# Altium PCB Pcb.PcbDoc
Units mil, origin at the board's own origin, x right, y up, seen from the top; angles counter-clockwise.
Board outline 3543.32 x 3543.32 mil, 2 copper layers (Top Layer, Bottom Layer); 60 components, 123 nets, 337 pads, 105 vias.
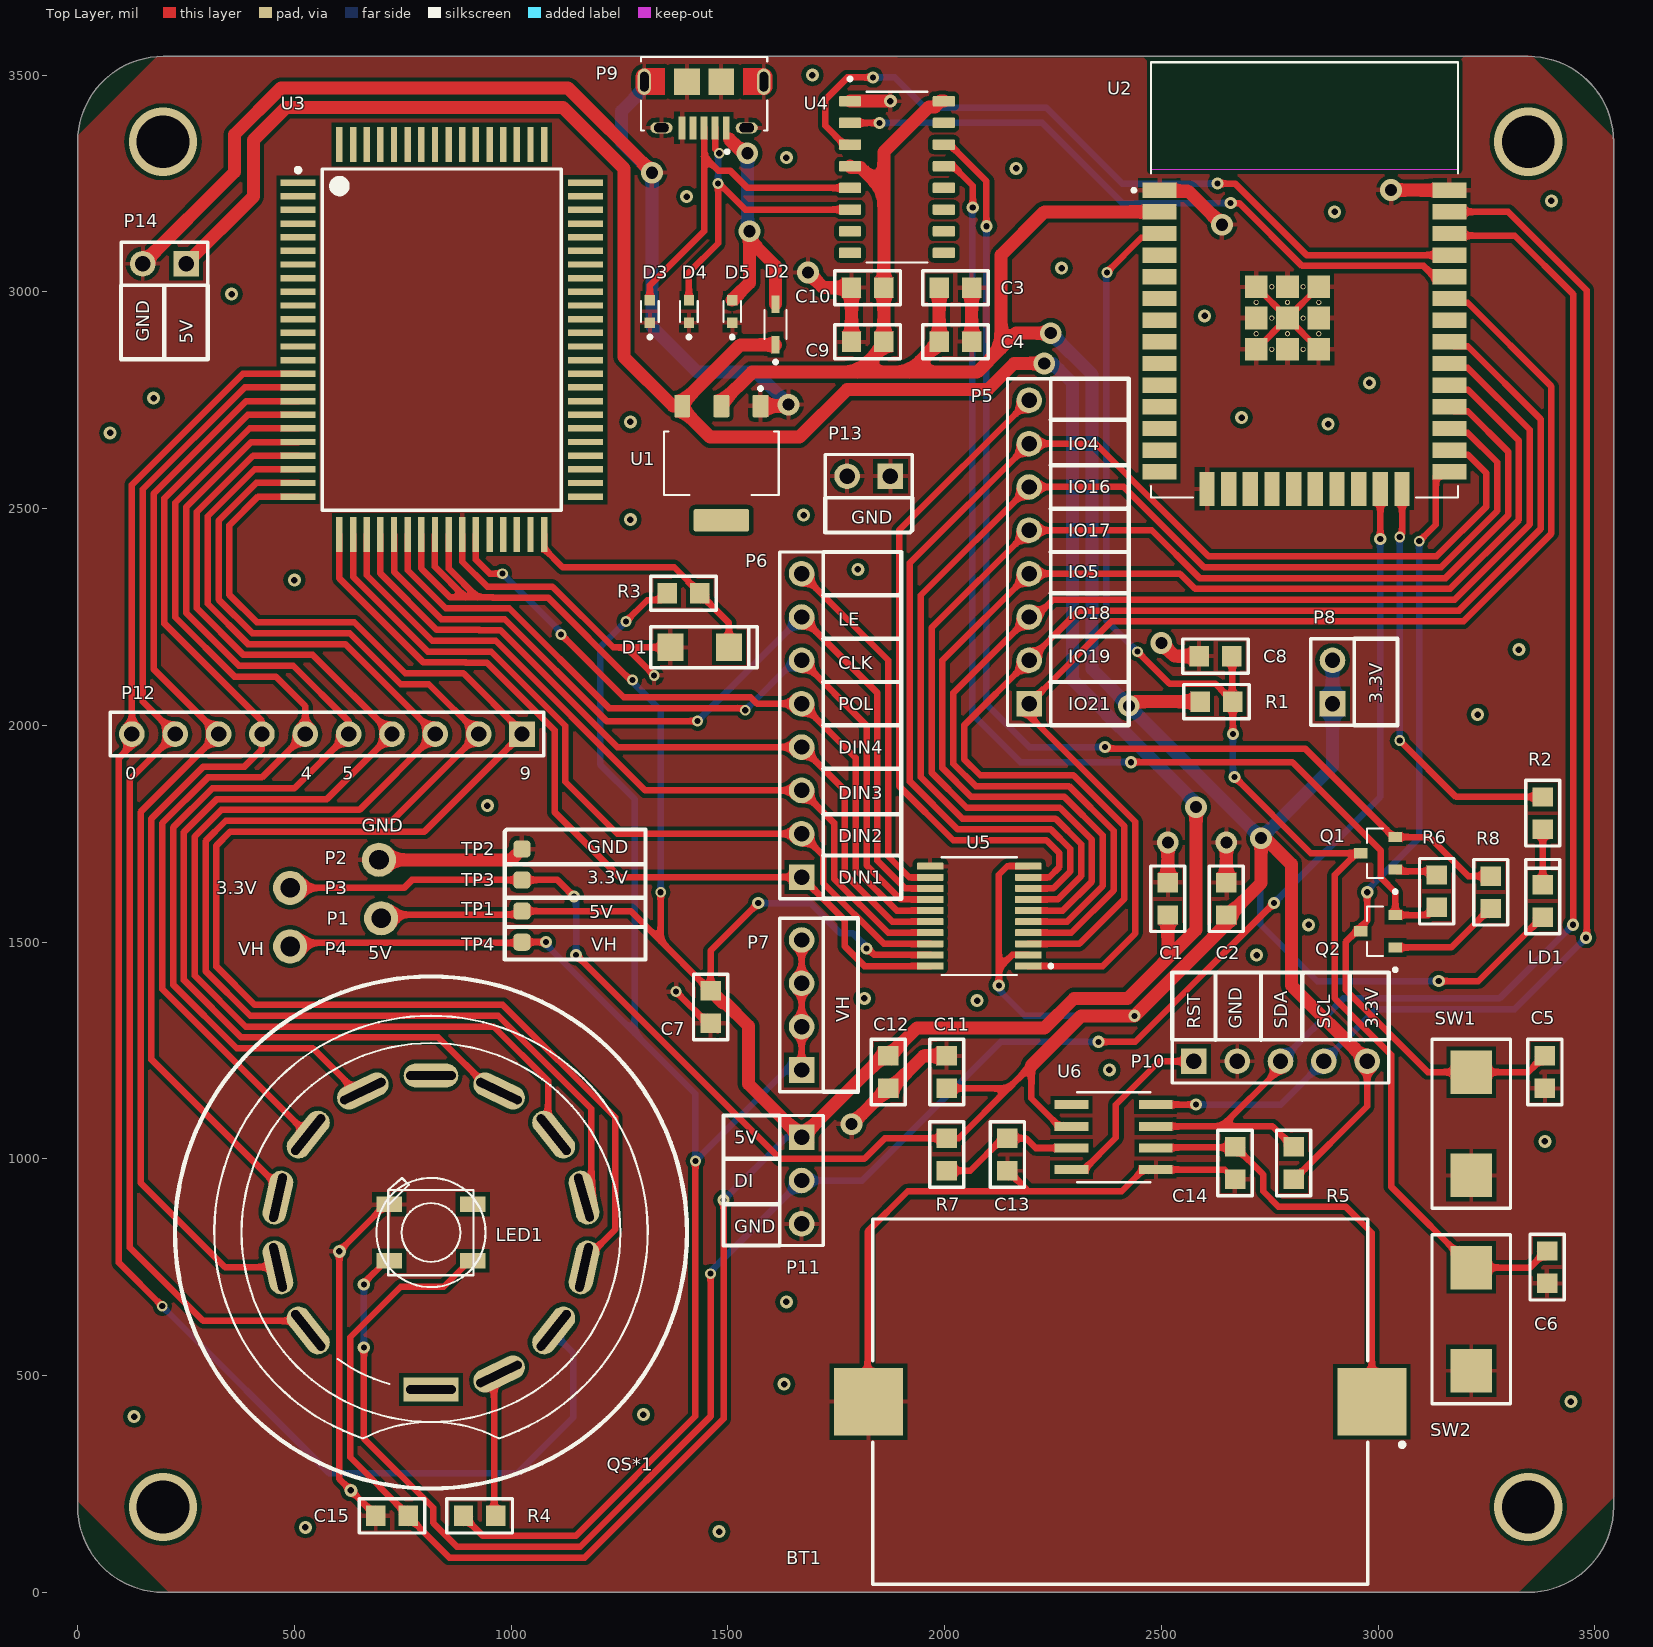
[diagram p0: Top Layer view]
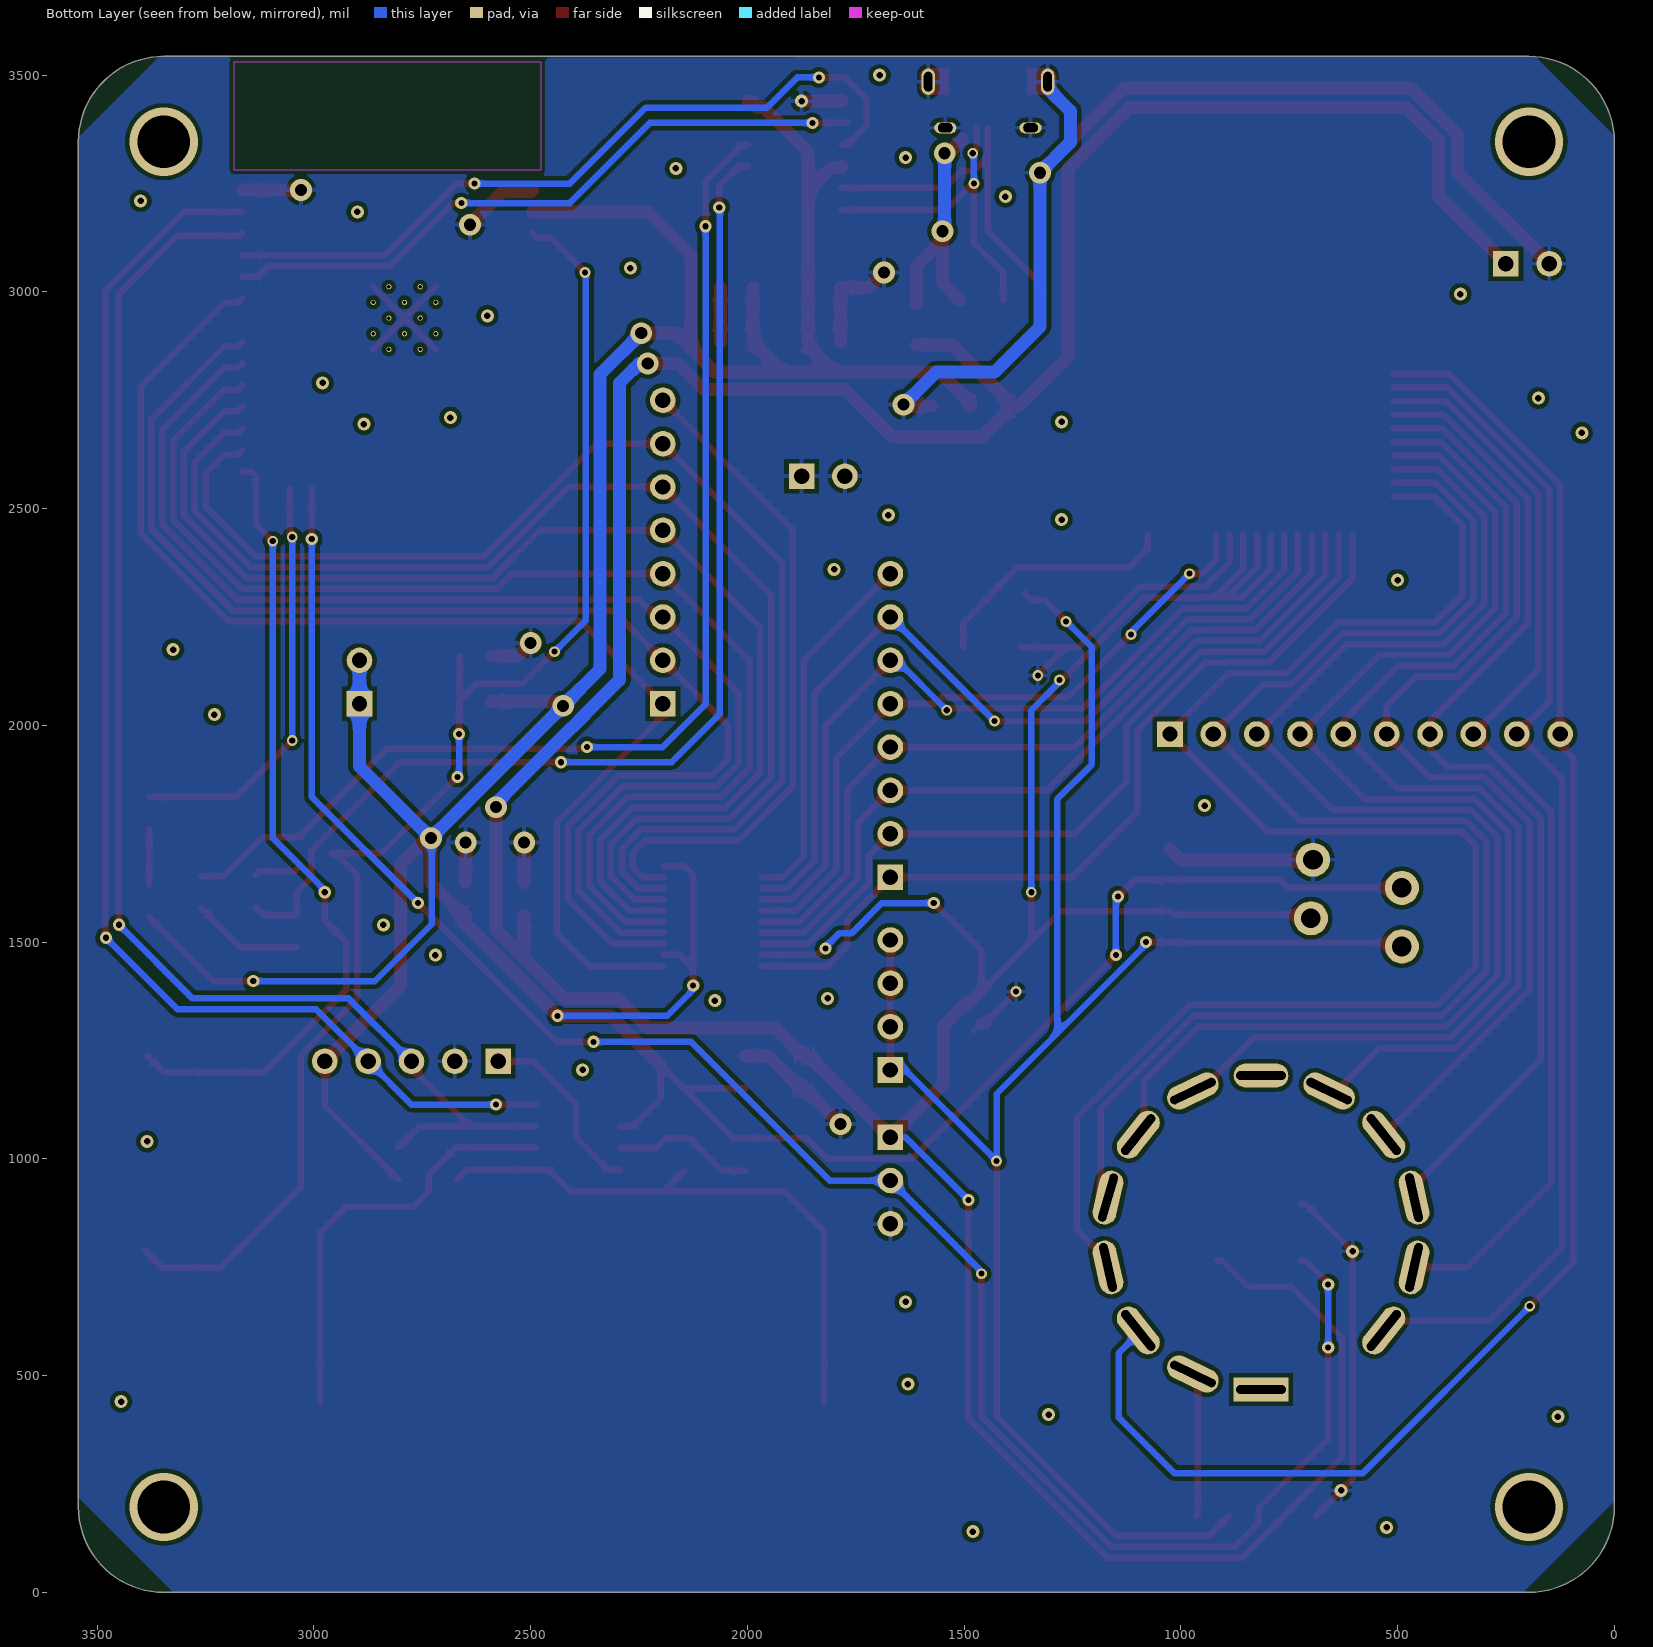
[diagram p1: Bottom Layer view, seen from below]

## Layer stack, top to bottom
Top Solder: solder mask 0.4, Solder Resist, Dk 3.5
Top Layer: signal copper 1.4
Dielectric 1: dielectric 12.6, FR-4, Dk 4.8
Bottom Layer: signal copper 1.4
Bottom Solder: solder mask 0.4, Solder Resist, Dk 3.5

## Board outline
0.01,196.86 0.01,3346.46 0,3346.46 cw(c196.86,3346.46) 196.86,3543.32 196.86,3543.31 3346.46,3543.31 3346.46,3543.32 cw(c3346.46,3346.46) 3543.32,3346.46 3543.31,3346.46 3543.31,196.86 3543.32,196.86 cw(c3346.46,196.86) 3346.46,0 3346.46,0.01 196.86,0.01 196.86,0 cw(c196.86,196.86)

## Design rules (kind name [scope] priority, off if disabled: settings)
Clearance [All] p1: gap=10 ignorepadtopadclearanceinfootprint=FALSE except(0: Arc-Hole Track-Hole SMDPad-Hole THPad-Hole Via-Hole Fill-Hole Poly-Hole Region-Hole Text-Hole)
PolygonConnect [All] p1: connectstyle=Relief reliefconductorwidth=10 reliefentries=4 polygonreliefangle="90 Angle" airgapwidth=10
RoutingVias [All] p1: holewidth=28 width=50 viastyle="Through Hole" minholewidth=14 minwidth=25 maxholewidth=393.7 maxwidth=590.55
SolderMaskExpansion [All] p1: expansion=4
Width [All] p1: maxlimit=100 minlimit=10 preferedwidth=10
30 further rules are at their usual default settings.

## Components (designator, comment, footprint, x,y, rotation, side; value= is the part's Value field where it differs from the comment)
BT1 "CR2032 BS-10" "CR2032 BS-10" 2405,440 r180 top
C1 "22uF/10V(20%)" 0805 2515,1600 r90 top
C2 "22uF/10V(20%)" 0805 2650,1600 r90 top
C3 "22uF/10V" 0805 2025,3010 r180 top
C4 "0.1uF/50V" 0805 2025,2885 r180 top
C5 "100uF/50V(10%)" 0805 3385,1200 r90 top
C6 "100nF/50V(10%)" 0805 3390,750 r90 top
C7 "100pF" 0805 1460,1350 r90 top locked
C8 "100nF/50V" 0805 2625,2160 r0 top
C9 "100nF" 0805 1822.6,2885 r0 top
C10 "100nF" 0805 1822.6,3010 r0 top
C11 "100nF" 0805 2005,1200 r270 top
C12 "100nF" 0805 1870,1200 r90 top
C13 "100nF" 0805 2145,1010 r90 top
C14 "100nF" 0805 2670,990 r90 top
C15 "100nF" 0805 725,176.18 r0 top
D1 "75V/0.5W" "1206 Semiconductor" 1435,2180 r180 top locked
D2 "BAT760-7" BAT760-7_SOD2513X120N 1610,2925 r90 top
D3 "LESD5D5.0CT1G" TVS_LESD5D5.0CT1G 1320,2955 r90 top
D4 "LESD5D5.0CT1G" TVS_LESD5D5.0CT1G 1410,2955 r90 top
D5 "LESD5D5.0CT1G" TVS_LESD5D5.0CT1G 1510,2955 r90 top
LD1 "LED" "0805 Semiconductor" 3380,1595 r270 top
LED1 "WS2812B" WS2812B 815,830 r0 top
P1 "Hole" HOLE_1M2 700,1555 r0 top
P2 "Hole" HOLE_1M2 695,1690 r0 top
P3 "Hole" HOLE_1M2 490,1625 r0 top
P4 "Hole" HOLE_1M2 490,1490 r0 top
P5 "Header 8" HDR1X8 2195,2050 r90 top
P6 "Header 8" HDR1X8 1670,1650 r90 top locked
P7 "Header 4" HDR1X4 1670,1205 r90 top locked
P8 "Header 2" HDR1X2 2895,2050 r90 top
P9 "Usb_Micro_AMPHENOL_10118194-0001LF" USB_MICRO_AMPHENOL_10118194-0001LF 1445,3485 r180 top
P10 "Header 5" HDR1X5 2575,1225 r0 top
P11 "Header 3" HDR1X3 1670,1050 r270 top locked
P12 "Header 10" HDR1X10 1025,1980 r180 top locked
P13 "Header 2" HDR1X2 1875,2575 r180 top
P14 "Header 2" HDR1X2 250,3065 r180 top
Q1 "SS8050-G" TRANS_SS8050-G 3000,1705 r180 top
Q2 "SS8050-G" TRANS_SS8050-G 3000,1525 r180 top
QS*1 "QS30-1" QS30-1 815,830 r0 top locked
R1 "10K(5%)" 0805 2627.4,2055 r0 top
R2 "1K(5%)" 0805 3380,1797.4 r270 top
R3 "240K" 0805 1397.6,2305 r0 top locked
R4 "20K" 0805 927.4,176.18 r180 top
R5 "10K" 0805 2805,990 r270 top
R6 "10K(5%)" 0805 3135,1617.4 r90 top
R7 "10K" 0805 2005,1010 r90 top
R8 "10K(5%)" 0805 3260,1615 r270 top
SW1 "Switch" 2917 3215,1080.91 r90 top
SW2 "Switch" 2917 3215,630 r90 top
TP1 "TestPoint" Test-Point-SMD 1025,1571.67 r90 top
TP2 "TestPoint" Test-Point-SMD 1025,1715 r90 top
TP3 "TestPoint" Test-Point-SMD 1025,1643.33 r90 top
TP4 "TestPoint" Test-Point-SMD 1025,1500 r90 top
U1 "AMS1117-3.3" AMS1117_3V3_SOT229P700X180-4N 1485,2605 r180 top
U2 "ESP32-WROOM-32D" ESP32-WROOM-32D 2830.35,3027.91 r0 top locked
U3 "HV57708PG-G" HV57708 840,2890 r0 top locked
U4 "CH340C" CH340C_SOIC127P600X180-16N 1890,3265 r0 top
U5 "TXS0108EPW" TXS0108EPW 2080,1560 r180 top
U6 "DS3231MZVT" DS3231 2390,1050 r0 top

## Footprints (in the part's own frame and the unit in brackets; to place one, negate y for a bottom-side part, rotate by r counter-clockwise, add the part's x,y. Pads: shape width x height; smd on the part's side, far side on the other; paste and mask are expansions set on the pad)
0805 [mm]
  rect 1.14x1.2 smd: 1(-0.95,0) 2(0.95,0)
  silkscreen extent -1.92,-1 1.92,1, body extent -1,-0.6 1,0.6, height 0.45
"0805 Semiconductor" [mm]
  rect 1.14x1.2 smd: 1(-0.95,0) 2(0.95,0)
  silkscreen extent -2.43,-1 1.92,1, body extent -1,-0.6 1,0.6, height 0.45
"1206 Semiconductor" [mm]
  rect 1.52x1.6 smd: 1(-1.71,0) 2(1.71,0)
  silkscreen extent -3.38,-1.2 2.87,1.2, body extent -1.6,-0.8 1.6,0.8, height 0.55
2917 [mm]
  rect 2.55x2.45 smd: 1(-3.025,0) 2(3.025,0)
  silkscreen extent -4.95,-2.3 4.95,2.3
AMS1117_3V3_SOT229P700X180-4N [mm]
  rrect15% 0.93x1.31 smd: 1(-2.29,-3.345) 2(0,-3.345) 3(2.29,-3.345)
  rrect15% 3.24x1.31 smd: 4(0,3.345)
  silkscreen extent -3.36,-4.47 3.36,1.86
BAT760-7_SOD2513X120N [mm]
  rect 1.04x0.46 smd: A(1.19,0) C(-1.19,0)
  silkscreen extent -2.3,-0.65 0.85,0.65
CH340C_SOIC127P600X180-16N [mm]
  rrect25% 1.31x0.62 smd: 1(-2.75,4.445) 2(-2.75,3.175) 3(-2.75,1.905) 4(-2.75,0.635) 5(-2.75,-0.635) 6(-2.75,-1.905) 7(-2.75,-3.175) 8(-2.75,-4.445) 9(2.75,-4.445) 10(2.75,-3.175) 11(2.75,-1.905) 12(2.75,-0.635) 13(2.75,0.635) 14(2.75,1.905) 15(2.75,3.175) 16(2.75,4.445)
  silkscreen extent -2.85,-5 1.78,5.85, body extent -3,-5 3,5, height 1.8
"CR2032 BS-10" [mm] "SODFL, 2-Leads, Body 21.44x33.00mm, IPC Medium Density"
  rect 4.05x3.95 smd: 1(-14.75,0) 2(14.75,0)
  silkscreen extent -16.65,-10.7 14.5,10.7, body extent -14.48,-10.72 14.48,10.72, height 5.1
DS3231 [mil]
  rect 78x21 smd: 1(-97,75) 2(-97,25) 3(-97,-25) 4(-97,-75) 5(97,-75) 6(97,-25) 7(97,25) 8(97,75)
  silkscreen extent -84,-104 84,104
ESP32-WROOM-32D [mm]
  rect 2x0.9 smd: 1(-8.5,5.26) 2(-8.5,3.99) 3(-8.5,2.72) 4(-8.5,1.45) 5(-8.5,0.18) 6(-8.5,-1.09) 7(-8.5,-2.36) 8(-8.5,-3.63) 9(-8.5,-4.9) 10(-8.5,-6.17) 11(-8.5,-7.44) 12(-8.5,-8.71) 13(-8.5,-9.98) 14(-8.5,-11.25) 25(8.5,-11.25) 26(8.5,-9.98) 27(8.5,-8.71) 28(8.5,-7.44) 29(8.5,-6.17) 30(8.5,-4.9) 31(8.5,-3.63) 32(8.5,-2.36) 33(8.5,-1.09) 34(8.5,0.18) 35(8.5,1.45) 36(8.5,2.72) 37(8.5,3.99) 38(8.5,5.26)
  rect 0.9x2 smd: 15(-5.715,-12.25) 16(-4.445,-12.25) 17(-3.175,-12.25) 18(-1.905,-12.25) 19(-0.635,-12.25) 20(0.635,-12.25) 21(1.905,-12.25) 22(3.175,-12.25) 23(4.445,-12.25) 24(5.715,-12.25)
  rect 1.33x1.33 smd: 39(-2.835,-4.075) 39(-2.835,-2.24) 39(-2.835,-0.405) 39(-1,-4.075) 39(-1,-2.24) 39(-1,-0.405) 39(0.835,-4.075) 39(0.835,-2.24) 39(0.835,-0.405)
  round 0.3 hole 0.2: 39_10(-1.917,-0.405) 39_11(-0.082,-0.405) 39_12(-2.835,-1.322) 39_13(-1,-1.322) 39_14(0.835,-1.322) 39_15(-1.917,-2.24) 39_16(-0.082,-2.24) 39_17(-2.835,-3.157) 39_18(-1,-3.157) 39_19(0.835,-3.157) 39_20(-1.917,-4.075) 39_21(-0.082,-4.075)
  Keep-Out Layer region: 9,6.45 -9,6.45 -9,12.75 9,12.75
  Keep-Out Layer region: 9,6.45 -9,6.45 -9,12.75 9,12.75
  silkscreen extent -10.1,-12.75 9,12.75
HDR1X2 [mm] "Connector; Header; 2 Position"
  rect 1.5x1.5 hole 0.9: 1(0,0)
  round 1.5 hole 0.9: 2(2.54,0)
  silkscreen extent -1.27,-1.27 3.81,1.27
HDR1X3 [mm] "Connector; Header; 3 Position"
  rect 1.5x1.5 hole 0.9: 1(0,0)
  round 1.5 hole 0.9: 2(2.54,0) 3(5.08,0)
  silkscreen extent -1.27,-1.27 6.35,1.27
HDR1X4 [mm] "Connector; Header; 4 Position"
  rect 1.5x1.5 hole 0.9: 1(0,0)
  round 1.5 hole 0.9: 2(2.54,0) 3(5.08,0) 4(7.62,0)
  silkscreen extent -1.27,-1.27 8.89,1.27
HDR1X5 [mm] "Connector; Header; 5 Position"
  rect 1.5x1.5 hole 0.9: 1(0,0)
  round 1.5 hole 0.9: 2(2.54,0) 3(5.08,0) 4(7.62,0) 5(10.16,0)
  silkscreen extent -1.27,-1.27 11.43,1.27
HDR1X8 [mm] "Connector; Header; 8 Position"
  rect 1.5x1.5 hole 0.9: 1(0,0)
  round 1.5 hole 0.9: 2(2.54,0) 3(5.08,0) 4(7.62,0) 5(10.16,0) 6(12.7,0) 7(15.24,0) 8(17.78,0)
  silkscreen extent -1.27,-1.27 19.05,1.27
HDR1X10 [mm] "Connector; Header; 10 Position"
  rect 1.5x1.5 hole 0.9: 1(0,0)
  round 1.5 hole 0.9: 2(2.54,0) 3(5.08,0) 4(7.62,0) 5(10.16,0) 6(12.7,0) 7(15.24,0) 8(17.78,0) 9(20.32,0) 10(22.86,0)
  silkscreen extent -1.27,-1.27 24.13,1.27
HOLE_1M2 [mm]
  round 2 hole 1.15: 1(0,0)
HV57708 [mm] "QFP, 80-Leads, Body 14.00x20.00mm, Pitch 0.80mm, IPC Medium Density"
  rect 2.05x0.375 smd: 1(-8.425,9.2) 2(-8.425,8.4) 3(-8.425,7.6) 4(-8.425,6.8) 5(-8.425,6) 6(-8.425,5.2) 7(-8.425,4.4) 8(-8.425,3.6) 9(-8.425,2.8) 10(-8.425,2) 11(-8.425,1.2) 12(-8.425,0.4) 13(-8.425,-0.4) 14(-8.425,-1.2) 15(-8.425,-2) 16(-8.425,-2.8) 17(-8.425,-3.6) 18(-8.425,-4.4) 19(-8.425,-5.2) 20(-8.425,-6) 21(-8.425,-6.8) 22(-8.425,-7.6) 23(-8.425,-8.4) 24(-8.425,-9.2) 41(8.425,-9.2) 42(8.425,-8.4) 43(8.425,-7.6) 44(8.425,-6.8) 45(8.425,-6) 46(8.425,-5.2) 47(8.425,-4.4) 48(8.425,-3.6) 49(8.425,-2.8) 50(8.425,-2) 51(8.425,-1.2) 52(8.425,-0.4) 53(8.425,0.4) 54(8.425,1.2) 55(8.425,2) 56(8.425,2.8) 57(8.425,3.6) 58(8.425,4.4) 59(8.425,5.2) 60(8.425,6) 61(8.425,6.8) 62(8.425,7.6) 63(8.425,8.4) 64(8.425,9.2)
  rect 0.375x2.05 smd: 25(-6,-11.425) 26(-5.2,-11.425) 27(-4.4,-11.425) 28(-3.6,-11.425) 29(-2.8,-11.425) 30(-2,-11.425) 31(-1.2,-11.425) 32(-0.4,-11.425) 33(0.4,-11.425) 34(1.2,-11.425) 35(2,-11.425) 36(2.8,-11.425) 37(3.6,-11.425) 38(4.4,-11.425) 39(5.2,-11.425) 40(6,-11.425) 65(6,11.425) 66(5.2,11.425) 67(4.4,11.425) 68(3.6,11.425) 69(2.8,11.425) 70(2,11.425) 71(1.2,11.425) 72(0.4,11.425) 73(-0.4,11.425) 74(-1.2,11.425) 75(-2,11.425) 76(-2.8,11.425) 77(-3.6,11.425) 78(-4.4,11.425) 79(-5.2,11.425) 80(-6,11.425)
  silkscreen extent -8.55,-10 7,10.06, body extent -7,-10 7,10, height 3.1
QS30-1 [mm]
  rect 3.2x1.4 hole 0.5 slot 2.9 at 0 deg: 1(0,-9.2)
  oval 3.2x1.4 hole 0.5 slot 2.9 at 25.71 deg rot 25.71: 2(3.992,-8.289) 9(-3.992,8.289)
  oval 3.2x1.4 hole 0.5 slot 2.9 at 51.43 deg rot 51.43: 3(7.193,-5.736) 10(-7.193,5.736)
  oval 3.2x1.4 hole 0.5 slot 2.9 at 77.14 deg rot 77.14: 4(8.969,-2.047) 11(-8.969,2.047)
  oval 3.2x1.4 hole 0.5 slot 2.9 at 106.06 deg rot 102.86: 5(8.969,2.047)
  oval 3.2x1.4 hole 0.5 slot 2.9 at 128.57 deg rot 128.57: 6(7.193,5.736) 13(-7.193,-5.736)
  oval 3.2x1.4 hole 0.5 slot 2.9 at 154.29 deg rot 154.29: 7(3.992,8.289)
  oval 3.2x1.4 hole 0.5 slot 2.9 at 0 deg: 8(0,9.2)
  oval 3.2x1.4 hole 0.5 slot 2.9 at 102.86 deg rot 102.86: 12(-8.969,-2.047)
  silkscreen extent -15,-15 15,15
Test-Point-SMD [mil]
  rrect50% 40x40 smd: 1(0,0)
TRANS_SS8050-G [mm]
  rect 0.8x0.6 smd: 1(-1.01,0.95) 2(-1.01,-0.95) 3(1.01,0)
  silkscreen extent -1.11,-1.45 0.65,2.35, body extent -1.2,-1.45 1.2,1.45, height 1.14
TVS_LESD5D5.0CT1G [mm]
  rect 0.6x0.6 smd: 1(-0.66,0) 2(0.66,0)
  silkscreen extent -1.6,-0.52 0.6,0.52
TXS0108EPW [mm]
  rrect25% 1.57x0.41 smd: 1(-2.87,2.925) 2(-2.87,2.275) 3(-2.87,1.625) 4(-2.87,0.975) 5(-2.87,0.325) 6(-2.87,-0.325) 7(-2.87,-0.975) 8(-2.87,-1.625) 9(-2.87,-2.275) 10(-2.87,-2.925) 11(2.87,-2.925) 12(2.87,-2.275) 13(2.87,-1.625) 14(2.87,-0.975) 15(2.87,-0.325) 16(2.87,0.325) 17(2.87,0.975) 18(2.87,1.625) 19(2.87,2.275) 20(2.87,2.925)
  silkscreen extent -4.29,-3.45 2.2,3.45, body extent -3.25,-3.2 3.25,3.2, height 0.53
USB_MICRO_AMPHENOL_10118194-0001LF [mm]
  rect 0.4x1.35 smd: 1(-1.3,2.7) 2(-0.65,2.7) 3(0,2.7) 4(0.65,2.7) 5(1.3,2.7)
  oval 0.775x1.55 hole 0.5 slot 1.15 at 90 deg: 6(-3.5,0) 6(3.5,0)
  oval 1.3x0.65 hole 0.55 slot 0.85 at 0 deg: 6(-2.5,2.7) 6(2.5,2.7)
  rect 1.5x1.55 smd: 6(-1,0) 6(1,0)
  Top Layer region: 193 vertices and 0 holes, not listed, extent -4,-0.775 -2.3,0.78
  Top Layer region: 193 vertices and 0 holes, not listed, extent 2.3,-0.78 4,0.775
  silkscreen extent -3.7,-1.45 3.7,4.2
WS2812B [mm]
  rect 1.5x0.9 smd: 1-VDD(2.45,-1.65) 2-DOUT(2.45,1.65) 3-GND(-2.45,1.65) 4-DIN(-2.45,-1.65)
  silkscreen extent -2.5,-2.5 2.5,3.2

## Part data
C1 C2 C3 C4 C5 C6 C8 C9 C10: library part Capacitor, "Capacitor"
C7 C11 C12 C13 C14 C15: library part Capacitor
D1: library part DiodeZener
D2: "Diode Schottky 30V 1A 2-Pin SOD-323 T/R", Package=None, Availability=Good, DigiKey-Purchase-URL=https://snapeda.com/shop?store=DigiKey&id=4817231, MF="Diodes Zetex", Mouser-Purchase-URL=https://snapeda.com/shop?store=Mouser&id=4817231, MP=BAT760-7, Price=None, SnapEDA_Link=https://www.snapeda.com/parts/BAT760-7/Zetex/view-part/4817231/?ref=snap
D3 D4 D5: "Transient Voltage Suppressors for ESD Protection", Package=None, Availability="Not in stock", Check_prices=https://www.snapeda.com/parts/LESD5D5.0CT1G/Leshan+Radio+Co./view-part/?ref=eda, MF="Leshan Radio Co.", MP=LESD5D5.0CT1G, Price=None, SnapEDA_Link=https://www.snapeda.com/parts/LESD5D5.0CT1G/Leshan+Radio+Co./view-part/?ref=snap
LED1: "Raspberry Pi HAT _40 pin_ Wheeled Robotics Kit", Package=None, Availability=Unavailable, MF="SparkFun Electronics", MP=WS2812B, Price=None, SnapEDA_Link=https://www.snapeda.com/parts/WS2812B/Worldsemi/view-part/1038297/?ref=snap
P5 P6: "Header, 8-Pin", LatestRevisionDate=17-Jul-2002, LatestRevisionNote="Re-released for DXP Platform.", Publisher="Altium Limited"
P7: "Header, 4-Pin", LatestRevisionDate=17-Jul-2002, LatestRevisionNote="Re-released for DXP Platform.", Publisher="Altium Limited"
P8 P13 P14: "Header, 2-Pin", LatestRevisionDate=17-Jul-2002, LatestRevisionNote="Re-released for DXP Platform.", Publisher="Altium Limited"
P9: library part Usb_Micro
P10: "Header, 5-Pin", LatestRevisionDate=17-Jul-2002, LatestRevisionNote="Re-released for DXP Platform.", Publisher="Altium Limited"
P11: "Header, 3-Pin", LatestRevisionDate=17-Jul-2002, LatestRevisionNote="Re-released for DXP Platform.", Publisher="Altium Limited"
P12: "Header, 10-Pin", LatestRevisionDate=17-Jul-2002, LatestRevisionNote="Re-released for DXP Platform.", Publisher="Altium Limited"
Q1 Q2: "Bipolar (BJT) Transistor NPN 25 V 1.5 A 100MHz 300 mW Surface Mount SOT-23-3", Package="TO-236-3 Comchip Technology", Availability="In Stock", Check_prices=https://www.snapeda.com/parts/SS8050-G/Comchip+Technology/view-part/?ref=eda, MF="Comchip Technology", MP=SS8050-G, Price=None, Purchase-URL=https://pricing.snapeda.com/search/part/SS8050-G/?ref=eda, SnapEDA_Link=https://www.snapeda.com/parts/SS8050-G/Comchip+Technology/view-part/?ref=snap
R1 R2 R6 R8: library part Resistor, "Resistor"
R3 R4 R5 R7: library part Resistor
SW1 SW2: "Resistor"
U1: "Sot223/Pkg 1-Amp 3.3-Volt Low Drop Out Voltage Regulatator", Package=None, Availability=Unavailable, MF="Advanced Monolithic Systems", MP=AMS1117-3.3, Price=None, SnapEDA_Link=https://www.snapeda.com/parts/AMS1117-3.3/Advanced%20Monolithic%20Systems/view-part/53450/?ref=snap
U2: "Bluetooth, WiFi 802.11b/g/n, Bluetooth v4.2 + EDR, Class 1, 2 and 3 Transceiver Module 2.4GHz ~ 2.5GHz Integrated, Trace Surface Mount", Package="Module Espressif Systems", Availability=Unavailable, MF="Espressif Systems", MP=ESP32-WROOM-32D, Price=None, SnapEDA_Link=https://www.snapeda.com/parts/ESP32-WROOM-32D/Espressif%20Systems/view-part/2768115/?ref=snap
U3: "No Description Available", Mfr_Name=Microchip, RefDes=RefDes, Type=Type
U6: "Real Time Clock _RTC_ IC Clock/Calendar I²C, 2-Wire Serial 8-SOIC _0.154, 3.90mm Width_", Package="SOIC-8 Maxim Integrated", Digi-Key_Part_Number=DS3231MZ/V+TTR-ND, Digi-Key_Purchase_URL=https://www.digikey.com/product-detail/en/maxim-integrated/DS3231MZ-V-T/DS3231MZ-V-TTR-ND/3440500?utm_source=snapeda&utm_medium=aggregator&utm_campaign=symbol, MF="Maxim Integrated", MP=DS3231MZ/V+T, SnapEDA_Link=https://www.snapeda.com/parts/DS3231MZ/V+T/Maxim%20Integrated/view-part/230018/?ref=snap

## Via types
v1: diameter 30, hole 15, Top Layer to Bottom Layer, 38 vias
v2: diameter 28, hole 14, Top Layer to Bottom Layer, 28 vias
v3: diameter 25, hole 14, Top Layer to Bottom Layer, 19 vias
v4: diameter 50, hole 28, Top Layer to Bottom Layer, 16 vias
v5: diameter 157.48, hole 122.05, Top Layer to Bottom Layer, 4 vias

## Nets (pads, with @x,y where several pads share a name; then routed paths per layer and width w, separated by ;. In a path a pad name is that pad's centre, name@x,y a point inside that pad or via, vN(x,y) a via of type N, cw(c..) or ccw(c..) an arc to the next point about the centre after c; other vN are vias at no path point)
CH340_DN: D4.2 P9.2 U4.6 | length 759.7
  Top Layer w15: D4.2 1410,3045 1477.5,3112.5 v3(1477.5,3250) 1480,3250 1540,3190 U4.6 ; P9.2 1470.59,3329.41 v3(1480,3320)
  Bottom Layer w15: v3(1477.5,3250) 1477.5,3317.5 v3(1480,3320)
CH340_DP: D3.2 P9.3 U4.5 | length 816.3
  Top Layer w15: D3.2 1320,3015 1445,3140 1445,3312.57 ; P9.3 1445,3312.57 ; U4.5 1545,3240 1505,3280 1477.57,3280 1445,3312.57
CH340_DTR: Q2.2 R6.1 U4.13 | length 2643.1
  Top Layer w15: U4.13 2020,3290 2065,3245 v2(2065,3195) ; v2(2430,1915) 2802.54,1915 3006.52,1711.03 3006.52,1648.54 3039.76,1615.29 Q2.2 3116.22,1562.4 3133.82,1580 R6.1
  Bottom Layer w15: v2(2065,3195) 2063.5,3193.5 2063.5,2026.5 2175,1915 v2(2430,1915)
CH340_RTS: Q1.2 R8.1 U4.14 | length 2667.7
  Top Layer w15: U4.14 2011.85,3340 2096.5,3255.35 v2(2096.5,3151.5) ; v2(2370,1950) 2373.5,1946.5 2831.73,1946.5 3035.83,1742.4 Q1.2 3118.21,1742.4 3208.21,1652.4 R8.1
  Bottom Layer w15: v2(2096.5,3151.5) 2096.5,2048.5 2195,1950 v2(2370,1950)
CH340_RXD: U2.35 U4.3 | length 1766.5
  Top Layer w15: U4.3 1768.15,3340 1725,3383.15 1725,3444.22 1775.78,3495 v2(1835,3495) ; v2(2630,3250) 2670,3250 2835,3085 U2.35
  Bottom Layer w15: v2(1835,3495) 1885,3495 1955,3425 2235,3425 2410,3250 v2(2630,3250)
CH340_TXD: U2.34 U4.2 | length 1543.9
  Top Layer w15: U4.2@1768.15,3390 U4.2 v2(1850,3390) ; v2(2660,3205) 2679.64,3205 2824.64,3060 3105,3060 3130,3035 U2.34
  Bottom Layer w15: v2(1850,3390) 2225,3390 2410,3205 v2(2660,3205)
CLK: U2.20
CMD: U2.19
DI: LED1.4-DIN P11.2 U2.23 | length 4535.5
  Top Layer w15: v2(660,565) 660,355 820,195 820,160 875,105 1159.29,105 1460,405.71 v3(1460,735) ; v2(660,710) 660,713.31 711.73,765.04 LED1.4-DIN@723.54,765.04 ; v2(2355,1270) 2440,1270 v2(2760,1590) ; v2(3005,2430) 3005.18,2430.18 3005.18,2545.45 U2.23
  Bottom Layer w15: v2(660,565) v2(660,710) ; v3(1460,735) 1460,740 P11.2 1810,950 2130,1270 v2(2355,1270) ; v2(2760,1590) 3005,1835 v2(3005,2430)
DIN1: P6.1 U3.25 U5.20 | length 1980.6
  Top Layer w15: U3.25 603.78,2338.9 797.5,2145.18 894.91,2145.18 895.09,2145 943.8,2145 1100,1988.8 1100,1800 1250,1650 P6.1 1770,1550 1770,1490 1815.16,1444.84 U5.20
DIN2: P6.2 U3.26 U5.18 | length 1893
  Top Layer w15: U3.26 635.28,2342.76 807.86,2170.18 905.26,2170.18 905.44,2170 954.16,2170 1125,1999.16 1125,1870 1245,1750 P6.2 1720,1700 1720,1636.04 1860.02,1496.02 U5.18
DIN3: P6.3 U3.27 U5.17 | length 1810.9
  Top Layer w15: U3.27 666.77,2346.62 818.21,2195.18 915.62,2195.18 915.8,2195 964.51,2195 1309.51,1850 P6.3 1745,1775 1745,1646.4 1869.78,1521.61 U5.17
DIN4: P6.4 U3.28 U5.16 | length 1804.4
  Top Layer w15: U3.28 698.27,2350.48 828.57,2220.18 925.97,2220.18 926.15,2220 974.87,2220 1244.87,1950 P6.4 1770,1850 1770,1656.75 1879.53,1547.22 U5.16
ESP_EN: C6.2 C8.2 Q1.3 R1.2 SW2.2 U2.3 | length 3273.8
  Top Layer w15: v3(2375,3045) 2375,3046.13 2453.66,3124.78 2485.49,3124.78 U2.3 ; v3(2445,2170) 2518.88,2096.12 2624.86,2096.12 R1.2@2663.6,2057.38 ; C8.2 2663.6,2158.8 R1.2@2663.6,2057.38 ; v2(2665,1980) 2664.8,1980.2 R1.2 2664.8,2056.18 R1.2@2663.6,2057.38 ; v2(2668.75,1881.25) 2845,1705 Q1.3@2950,1705 ; Q1.3 Q1.3@2950,1705 ; C6.2 3388.82,787.4 3350.51,749.09 SW2.2 3215,751.06 3030,936.06 3030,1240 2900,1370 2900,1655 Q1.3@2950,1705
  Bottom Layer w15: v3(2375,3045) 2372.5,3042.5 2372.5,2242.5 v3(2445,2170) ; v2(2665,1980) 2665,1885 v2(2668.75,1881.25)
ESP_IO0: C5.2 Q2.3 SW1.2 U2.25 | length 1861.3
  Top Layer w15: v2(2975,1615) 2975,1550 2925,1500 2925,1390 3115,1200 SW1.2 3346.42,1200 3383.82,1237.4 C5.2 ; v3(3095,2425) 3133.13,2463.13 3133.13,2574.78 3143.35,2585 U2.25
  Bottom Layer w15: v2(2975,1615) 2975,1620 3095,1740 v3(3095,2425)
GND: BT1.2 C1.2 C2.2 C3.1 C4.1 C5.1 C6.1 C7.1 C8.1 C9.1 C10.1 C11.1 C12.1 C13.1 C14.1 C15.1 D1.2 D3.1 D4.1 D5.1 LED1.3-GND P2.1 P9.5 P9.6 P10.2 P11.3 P13.1 P13.2 P14.2 SW1.1 SW2.1 TP2.1 U1.1 U2.1 U2.15 U2.38 U2.39 U3.34 U4.1 U5.11 U6.5 | length 7680.2
  Top Layer w15: C15.1@687.6,175 C15.1 687.6,177.36 603.5,261.46 v1(603.5,786.73) 711.73,894.96 LED1.3-GND@723.54,894.96 ; U3.34 887.24,2377.76 944.82,2320.18 967.4,2320.18 967.57,2320 1095.36,2320 1235.36,2180 1265,2180 ; v3(1330,2115) 1265,2180 ; D1.2 1265,2180 ; v3(1380,1385.98) C7.1@1453.38,1312.6 ; C7.1@1458.82,1312.6 C7.1 1461.18,1312.6 1476.12,1297.66 C7.1@1476.12,1296.48 ; P11.3@1660,850 P11.3 ; BT1.2 1822.32,440 1822.32,832.32 1915,925 2408.5,925 2458.5,975 U6.5 2646.42,975 2668.82,952.6 C14.1 ; C13.1 2146.18,972.6 2188.78,930 ; U2.39@2718.74,2867.48 U2.39@2790.98,2939.72 ; U2.39@2718.74,3011.97 U2.39@2790.98,2939.72 ; U2.39@2863.23,2867.48 U2.39@2790.98,2939.72 ; U2.39@2863.23,3011.97 U2.39@2790.98,2939.72
  Top Layer w30: P14.2 361.72,3276.72 361.72,3363.28 468.43,3470 1131.57,3470 1325,3276.57 v4(1325,3275) ; P2.1 1000,1690 TP2.1 ; C7.1@1453.38,1312.6 C7.1@1458.82,1312.6 ; U1.1 1636.69,2736.69 v4(1640,2740) ; v4(1685,3045) 1720,3010 C10.1 C9.1 ; U4.1 v1(1875,3440) ; v4(1785,1080) 1786.22,1080 1868.82,1162.6 C12.1 1876.62,1162.6 1951.42,1237.4 C11.1 ; C4.1 C3.1 ; U2.1 2498.43,3232.28 2562.72,3232.28 v4(2640,3155) ; v4(2500,2190) 2530,2160 C8.1 ; C1.2 v4(2515,1730) ; C2.2 v4(2650,1730) ; v4(3030,3235) U2.38
  Bottom Layer w30: P9.6@1307.2,3485 1307.2,3469.74 1255,3417.54 1255,3345 v4(1325,3275) 1325,2920 1430,2815 1565,2815 v4(1640,2740)
  other v1: 630,235
HVCLK: P6.6 U3.30 U5.14 | length 1871.7
  Top Layer w15: U3.30 761.26,2358.19 849.28,2270.18 946.69,2270.18 946.86,2270 995.58,2270 1225.58,2040 1535,2040 v3(1540,2035) ; P6.6 1820,2000 1820,1677.46 1899.06,1598.41 U5.14
  Bottom Layer w15: v3(1540,2035) P6.6@1655,2150
HVLE: P6.7 U3.29 U5.13 | length 2051.3
  Top Layer w15: U3.29 729.76,2354.34 838.92,2245.18 936.33,2245.18 936.51,2245 985.23,2245 1220.23,2010 v3(1430,2010) ; P6.7 1845,2075 1845,1687.82 1908.82,1624 U5.13
  Bottom Layer w15: v3(1430,2010) P6.7
HVOUT1: P12.1 QS*1.4 U3.24 | length 3672.5
  Top Layer w15: U3.24 415.99,2527.8 350,2461.8 350,2301.07 413.39,2237.68 638.03,2237.68 755.53,2120.18 884.55,2120.18 884.73,2120 890,2120 1025,1985 P12.1 800,1755 352.13,1755 320,1722.87 320,1670 320,1485 320,1443.58 408.58,1355 980.71,1355 1240,1095.71 1240,837.08 QS*1.4@1168.12,765.21
HVOUT2: P12.2 QS*1.5 U3.23 | length 3381.6
  Top Layer w15: U3.23 412.13,2559.29 325,2472.16 325,2290.71 403.03,2212.68 627.68,2212.68 745.18,2095.18 809.82,2095.18 P12.2 725,1780 341.78,1780 295,1733.22 295,1670 295,1485 295,1433.22 398.22,1330 970.36,1330 1185,1115.36 1185,945 QS*1.5@1165.33,925.33
HVOUT3: P12.3 QS*1.6 U3.22 | length 3073.1
  Top Layer w15: U3.22 408.27,2590.79 300,2482.51 300,2280.36 392.68,2187.68 617.32,2187.68 P12.3 650,1805 331.42,1805 270,1743.58 270,1670 270,1485 270,1422.87 387.87,1305 960,1305 1085,1180 QS*1.6@1085,1100.83
HVOUT4: P12.4 QS*1.7 U3.21 | length 2811.7
  Top Layer w15: U3.21 404.42,2622.28 275,2492.87 275,2270 382.32,2162.68 542.32,2162.68 P12.4 575,1830 321.07,1830 245,1753.93 245,1670 245,1485 245,1412.51 377.51,1280 831.94,1280 QS*1.7@955.6,1156.34
HVOUT5: P12.5 QS*1.9 U3.20 | length 2452.3
  Top Layer w15: U3.20 400.56,2653.78 250,2503.22 250,2259.64 371.97,2137.68 497.32,2137.68 625,2010 P12.5 500,1855 310.71,1855 220,1764.29 220,1670 220,1485 220,1402.16 367.16,1255 542.63,1255 QS*1.9@641.3,1156.34
HVOUT6: P12.6 QS*1.10 U3.19 | length 2345.2
  Top Layer w15: U3.19 396.7,2685.28 225,2513.58 225,2249.29 361.61,2112.68 456.97,2112.68 525,2044.64 P12.6 425,1880 300.36,1880 195,1774.64 195,1670 195,1485 195,1391.8 525.49,1061.31 QS*1.10@537.29,1061.31
HVOUT7: P12.7 QS*1.11 U3.18 | length 2350.2
  Top Layer w15: QS*1.11@461.88,937.26 170,1229.14 170,1485 170,1670 170,1785 290,1905 385,1905 425,1945 P12.7 425,2010 200,2235 200,2523.93 392.84,2716.77 U3.18
HVOUT8: P12.8 QS*1.12 U3.17 | length 2545
  Top Layer w15: QS*1.12@461.28,750 340,750 145,945 145,1485 145,1670 145,1800 P12.8 175,2130 175,2534.29 388.98,2748.27 U3.17
HVOUT9: P12.9 QS*1.13 U3.16 | length 2739.3
  Top Layer w15: U3.16 385.12,2779.76 150,2544.64 150,2055 P12.9 120,1875 120,1670 120,1485 120,795.36 289.09,626.26 QS*1.13@509.72,626.26
HVOUT10: P12.10 QS*1.3 U3.15 | length 3837.4
  Top Layer w15: v3(195,660) 95,760 95,1485 95,1670 95,1925 125,1955 P12.10 125,2555 381.14,2811.14 508.19,2811.14 U3.15 ; QS*1.3@1083.77,589.75 QS*1.3
  Bottom Layer w15: v3(195,660) 580,275 1015,275 1143.79,403.79 1143.79,551.2 QS*1.3@1094.5,600.48
HVOUT11: U3.14
HVOUT12: U3.13
HVOUT13: U3.12
HVOUT14: U3.11
HVOUT15: U3.10
HVOUT16: U3.9
HVOUT17: U3.8
HVOUT18: U3.7
HVOUT19: U3.6
HVOUT20: U3.5
HVOUT21: U3.4
HVOUT22: U3.3
HVOUT23: U3.2
HVOUT24: U3.1
HVOUT25: U3.80
HVOUT26: U3.79
HVOUT27: U3.78
HVOUT28: U3.77
HVOUT29: U3.76
HVOUT30: U3.75
HVOUT31: U3.74
HVOUT32: U3.73
HVOUT33: U3.72
HVOUT34: U3.71
HVOUT35: U3.70
HVOUT36: U3.69
HVOUT37: U3.68
HVOUT38: U3.67
HVOUT39: U3.66
HVOUT40: U3.65
HVOUT41: U3.64
HVOUT42: U3.63
HVOUT43: U3.62
HVOUT44: U3.61
HVOUT45: U3.60
HVOUT46: U3.59
HVOUT47: U3.58
HVOUT48: U3.57
HVOUT49: U3.56
HVOUT50: U3.55
HVOUT51: U3.54
HVOUT52: U3.53
HVOUT53: U3.52
HVOUT54: U3.51
HVOUT55: U3.50
HVOUT56: U3.49
HVOUT57: U3.48
HVOUT58: U3.47
HVOUT59: U3.46
HVOUT60: U3.45
HVOUT61: U3.44
HVOUT62: U3.43
HVOUT63: U3.42
HVOUT64: U3.41
HVPOL: P6.5 U3.35 U5.15 | length 1595.5
  Top Layer w15: U3.35 918.74,2382.2 950.94,2350 v3(980,2350) ; v3(1115,2210) 1260,2065 1552.43,2065 1567.43,2050 P6.5 1795,1925 1795,1667.11 1889.29,1572.81 U5.15
  Bottom Layer w15: v3(980,2350) 1115,2215 v3(1115,2210)
IO2: R2.1 U2.24 | length 966.8
  Top Layer w15: v3(3050,1965) 3180.1,1834.9 3379.9,1834.9 R2.1 ; v3(3050,2435) 3050,2437.71 3055.35,2443.06 U2.24
  Bottom Layer w15: v3(3050,1965) v3(3050,2435)
IO4: P5.7 U2.26 U5.8 | length 2887.5
  Top Layer w15: U5.8 2250.98,1623.98 2290,1663 2290,1715.36 2245.36,1760 2030.36,1760 1920,1870.36 1920,2375 P5.7 2348.87,2650 2608.87,2390 3135,2390 3250,2505 3250,2581.84 3207.05,2624.78 3175.22,2624.78 U2.26
IO5: P5.4 U2.29 U5.5 | length 2894.9
  Top Layer w15: U5.5 2282.56,1547.2 2365,1629.64 2365,1746.42 2276.42,1835 2061.42,1835 1995,1901.42 1995,2150 P5.4 2542.81,2350 2577.81,2315 3166.07,2315 3325,2473.93 3325,2656.84 3207.05,2774.78 3175.22,2774.78 U2.29
IO12: U2.14
IO13: U2.16
IO14: U2.13
IO16: P5.6 U2.27 U5.7 | length 2889.5
  Top Layer w15: U5.7 2260.74,1598.39 2315,1652.64 2315,1725.71 2255.71,1785 2040.71,1785 1945,1880.71 1945,2300 P5.6 2413.52,2550 2598.52,2365 3145.36,2365 3275,2494.64 3275,2606.84 3207.05,2674.78 3175.22,2674.78 U2.27
IO17: P5.5 U2.28 U5.6 | length 2892.9
  Top Layer w15: U5.6 2272.8,1572.8 2340,1640 2340,1736.07 2266.07,1810 2051.07,1810 1970,1891.07 1970,2225 P5.5 2478.16,2450 2588.16,2340 3155.71,2340 3300,2484.29 3300,2631.84 3207.05,2724.78 3175.22,2724.78 U2.28
IO18: P5.3 U2.30 U5.4 | length 2930
  Top Layer w15: U5.4 2292.34,1521.63 2390,1619.29 2390,1756.78 2286.78,1860 2071.78,1860 2020,1911.78 2020,2075 P5.3 2210,2250 2250,2290 3176.42,2290 3350,2463.58 3350,2681.84 3207.05,2824.78 3175.22,2824.78 U2.30
IO19: P5.2 U2.31 U5.3 | length 2999.4
  Top Layer w15: U5.3 2311.04,1496.04 2415,1600 2415,1767.13 2297.13,1885 2082.13,1885 2045,1922.13 2045,2000 P5.2 2310,2265 3186.78,2265 3375,2453.22 3375,2706.84 3207.05,2874.78 3175.22,2874.78 U2.31
IO21: P5.1 U2.33 U5.1 | length 2935.5
  Top Layer w15: U5.1 2364.84,1444.84 2440,1520 2440,1777.49 2195,2022.49 P5.1 2385,2240 3197.13,2240 3400,2442.87 3400,2781.84 3207.05,2974.78 3175.22,2974.78 U2.33
IO22: P10.3 R5.1 U2.36 U6.7 | length 3148.9
  Top Layer w15: U6.7 2640,1075 ; P10.3 2772.97,1222.97 2772.97,1207.97 2640,1075 ; R5.1@2806.3,1028.7 R5.1 2803.82,1027.4 2756.22,1075 2640,1075 ; U2.36 3170.18,3129.82 3315.18,3129.82 3450,2995 3450,1560 v2(3450,1540)
  Bottom Layer w15: P10.3 2920,1370 3280,1370 v2(3450,1540)
IO23: P10.4 U2.37 U6.8 | length 3038.3
  Top Layer w15: U6.8 v2(2580,1125) ; U2.37 3300,3185 3481.5,3003.5 3481.5,1511.5 v2(3480,1510)
  Bottom Layer w15: v2(2580,1125) 2775,1125 P10.4 2995,1345 3315,1345 v2(3480,1510)
IO25: U2.10
IO26: U2.11
IO27: U2.12
IO32: U2.8
IO33: U2.9
IO34: U2.6
IO35: U2.7
NetBT1_1: BT1.1 C14.2 U6.6 | length 993.7
  Top Layer w15: U6.6 2488.2,1026.2 2668.8,1026.2 C14.2 2671.18,1027.4 2735,963.58 2735,925 2770,890 2925,890 2985.71,829.29 BT1.1
NetC13_2: C13.2 R7.1 U6.3 | length 328.3
  Top Layer w15: R7.1 2059.02,972.6 2133.82,1047.4 2135,1047.4 2187.64,1047.4 2210.04,1025 U6.3
NetD1_1: D1.1 R3.2 U3.40 | length 587.5
  Top Layer w15: U3.40 1076.22,2407.46 1118.68,2365 1376.18,2365 1435,2306.18 R3.2 1435,2303.82 1502.32,2236.5 D1.1
NetLD1_1: LD1.1 R2.2 | length 127.6
  Top Layer w15: LD1.1 R2.2
NetQ1_1: Q1.1 R6.2 | length 100.5
  Top Layer w15: Q1.1 3044.07,1663.29 3126.52,1663.29 R6.2
NetQ2_1: Q2.1 R8.2 | length 257.5
  Top Layer w15: Q2.1 3168.82,1487.6 3258.82,1577.6 R8.2
NetQS*1_2: QS*1.2 R4.1 | length 337.7
  Top Layer w15: R4.1 960.79,180.19 960.79,492.3 QS*1.2 QS*1.2@974.86,500.96
RST: P10.1 U6.4 | length 430.4
  Top Layer w15: U6.4 2321.5,975 2395,1048.5 2395,1125 2495,1225 P10.1
SD0: U2.21
SD1: U2.22
SD2: U2.17
SD3: U2.18
SENSOR_VN: U2.5
SENSOR_VP: U2.4
TXS_A8: P5.8 U5.9 | length 1562
  Top Layer w15: U5.9 2241.21,1649.57 2265,1673.35 2265,1705 2235,1735 2020,1735 1895,1860 1895,2450 P5.8
TXS_B8: P6.8 U5.12 | length 851.8
  Top Layer w15: P6.8 1870,2150 1870,1698.17 1918.59,1649.59 U5.12
USB_VBUS: D2.A D5.2 P9.1 | length 585.6
  Top Layer w30: P9.1@1503.46,3352.42 1535.88,3320 v4(1545,3320) ; D5.2 1550,3020.98 v4@1550,3120 ; v4(1550,3140) v4@1550,3120 ; D2.A 1610,3060 v4@1550,3120
  Bottom Layer w30: v4(1545,3320) 1545,3145 v4(1550,3140)
V3.3: C2.1 C3.2 C4.2 C9.2 C10.2 C11.2 LD1.2 P3.1 P8.1 P8.2 P10.5 R1.1 R5.2 R7.2 TP3.1 U1.2 U2.2 U4.4 U4.16 U5.2 U5.10 U6.2 | length 10535.6
  Top Layer w15: P3.1@485,1625 P3.1 752.84,1625 771.17,1643.33 TP3.1 1106.67,1643.33 v2(1145,1605) ; v2(1150,1470) 1620,1000 1815,1000 1862.4,1047.4 R7.2 2032.4,1047.4 2147.6,1162.6 ; C11.2 2147.6,1162.6 ; v2(2125,1400) 2125,1439.39 ; U5.2 2156.02,1470.41 2125,1439.39 ; U5.10@2192.97,1675.14 2144.57,1675.14 2125,1655.57 2125,1439.39 ; U6.2 2264.5,1075 2200,1139.5 2200,1215 2147.6,1162.6 ; R5.2@2803.82,952.6 R5.2 2806.18,952.6 2975,1121.42 P10.5 ; v2(3140,1410) 3231.22,1410 3378.82,1557.6 LD1.2
  Top Layer w30: U1.2 1485,2744.17 1555.83,2815 1800,2815 ; U4.4 1784.53,3287.2 1806.09,3287.2 1860,3233.29 ; C3.2 C4.2 1987.6,2883.82 1918.78,2815 ; U4.16 1990.28,3440 1977.48,3427.2 1963.91,3427.2 1860,3323.29 1860,3233.29 ; 2200,1215 2315,1330 v2(2438.43,1330) 2650,1541.57 C2.1 2656.62,1562.6 2730,1635.98 v4(2730,1740) 2730,1750 2800,1680 2800,1400 P10.5 ; v4(2245,2905) 2165,2905 2130,2870 ; v4(2425,2045) 2430.41,2045 2440.41,2055 R1.1 ; U2.2 2230,3185 2130,3085 2130,2870 ; 1800,2815 1918.78,2815 ; 1800,2815 1857.57,2872.57 1857.57,2882.57 C9.2 C10.2 1860,3233.29 ; 1918.78,2815 2075,2815 2130,2870
  Bottom Layer w15: v2(1145,1605) 1150,1600 v2(1150,1470) ; v2(2125,1400) 2125,1390 2185,1330 v2(2438.43,1330) ; v4(2730,1740) 2728.5,1738.5 2728.5,1541.5 2860,1410 v2(3140,1410)
  Bottom Layer w30: v4(2245,2905) 2340,2810 2340,2130 v4(2425,2045) v4(2730,1740) 2895,1905 P8.1 P8.2
V5: C1.1 C7.2 C12.2 C15.2 D2.C LED1.1-VDD P1.1 P11.1 P14.1 TP1.1 U1.3 U3.31 U3.32 U3.33 U5.19 | length 11884.1
  Top Layer w15: P1.1 708.33,1563.33 1016.67,1563.33 TP1.1 1275.74,1571.67 1345,1502.4 ; U3.31 792.76,2362.05 859.63,2295.18 894.82,2295.18 ; U3.32 824.25,2365.75 894.82,2295.18 ; U3.33 855.75,2361.75 922.32,2295.18 ; LED1.1-VDD@916.46,765.04 904.65,765.04 844.61,705 745,705 628.5,588.5 628.5,311.26 762.4,177.36 C15.2 762.4,175 857.4,80 1169.64,80 1490,400.36 v2(1490,905) ; v3(1280,2105) 1275,2105 1085,2295 957.22,2295 957.04,2295.18 922.32,2295.18 ; v3(1345,1615) 1345,1502.4 ; v2(1570,1590) 1460,1480 C7.2 1458.82,1387.4 1443.88,1402.34 1443.88,1403.52 1345,1502.4 ; v2(1820,1485) 1823.52,1485 1838.07,1470.45 U5.19 ; 894.82,2295.18 922.32,2295.18
  Top Layer w30: P14.1 405,3220 405,3350 480,3425 1120,3425 1260,3285 1260,2850 1373.31,2736.69 U1.3 ; C7.2 1461.18,1387.4 1488.54,1360.04 1493.98,1360.04 1547.5,1306.52 1547.5,1172.5 P11.1 1857.4,1237.4 C12.2 1871.18,1237.4 1936.18,1302.4 2230.83,1302.4 2298.43,1370 2421.86,1370 2580,1528.14 v4(2580,1811.37) ; D2.C 1528.82,2878.15 1394.84,2744.17 U1.3 ; v4(2230,2835) 2160,2835 2100,2775 1775,2775 1665,2665 1459.06,2665 1394.84,2729.21 U1.3 ; 2515,1470 C1.1
  Bottom Layer w15: v3(1280,2105) 1280,2100 1345,2035 v3(1345,1615) ; v2(1490,905) 1635,1050 P11.1 ; v2(1570,1590) 1690,1590 1760,1520 1788.52,1520 1820,1488.52 v2(1820,1485)
  Bottom Layer w30: v4(2230,2835) 2250,2835 2295,2790 2295,2105.15 2375,2025.15 2375,2024.29 2404.29,1995 2405.15,1995 2580,1820.15 v4(2580,1811.37)
VH: P4.1 P7.1 P7.2 P7.3 P7.4 R3.1 R4.2 TP4.1 | length 4271.2
  Top Layer w15: P4.1 498.13,1498.13 1023.13,1498.13 TP4.1 v2(1080,1500) ; R4.2 890,175 935,130 1148.93,130 1425,406.07 v3(1425,995) ; v3(1265,2240) 1313.88,2288.88 1345.26,2288.88 1360.2,2303.82 R3.1 ; P7.1 P7.2 P7.3 P7.4
  Bottom Layer w15: v2(1080,1500) 1080,1495 1285,1290 ; v3(1265,2240) 1205,2180 1205,1910 1285,1830 1285,1290 ; P7.1 1660,1215 1645,1215 v3(1425,995) 1425,1150 1285,1290
pads on no net: LED1.2-DOUT P9.4 QS*1.1 QS*1.8 U1.4 U2.32 U2.39_10 U2.39_11 U2.39_12 U2.39_13 U2.39_14 U2.39_15 U2.39_16 U2.39_17 U2.39_18 U2.39_19 U2.39_20 U2.39_21 U3.36 U3.37 U3.38 U3.39 U4.7 U4.8 U4.9 U4.10 U4.11 U4.12 U4.15 U6.1
copper on no net:
  other v1: 1480,140 525,150 130,405 1305,410 3445,440 1630,480 1635,670 3385,1040 2380,1205 2075,1365 1815,1370 2720,1470 2840,1540 945,1815 3230,2025 3325,2175 500,2335 1800,2360 1275,2475 1675,2485 75,2675 2885,2695 1275,2700 2685,2710 175,2755 2980,2790 2600,2945 355,2995 2270,3055 2900,3185 3400,3210 1405,3220 2165,3285 1635,3310 1695,3500
  other v5: 196.85,196.85 3346.46,196.85 196.85,3346.46 3346.46,3346.46

## Polygon pours and split planes (outlines as drawn)
GND on Bottom Layer "Bottom Layer-GND" (solid, pour order 0): 185,3545 0,3360 0,210 210,0 3325,0 3545,220 3545,3355 3355,3545 3199.8,3545 3184.69,3529.88 3184.69,3294.69 3175,3285 2485,3285 2475,3295 2475,3525 2460,3540
GND on Top Layer "Top Layer-GND" (solid, pour order 2): 185,3545 0,3360 0,210 210,0 3325,0 3545,220 3545,3355 3355,3545 3199.8,3545 3184.69,3529.88 3184.69,3294.69 3175,3285 2485,3285 2475,3295 2475,3525 2460,3540

## Silkscreen, mask and mechanical layers (free items; w line width, h text height)
Top Overlay:
  lines w10: 100,3015 100,2845 300,2845 300,3015 ; 200,2845 200,3015 ; 985,1535 1310,1535 ; 985,1602.5 1307.5,1602.5 1310,1605 ; 985,1680 1305,1680 ; 1490,895 1615,895 ; 1495,1000 1615,1000 ; 1620,800 1490,800 1490,1100 1620,1100 ; 1720,1155 1800,1155 1800,1555 1720,1555 ; 1720,1600 1900,1600 1900,2400 1720,2400 ; 1720,1700 1895,1700 1900,1695 ; 1720,1795 1895,1795 ; 1720,1900 1895,1900 ; 1720,2000 1900,2000 ; 1720,2100 1900,2100 ; 1720,2200 1900,2200 ; 1720,2300 1895,2300 1900,2305 ; 1725,2525 1725,2445 1920,2445 1925,2450 1925,2525 ; 2245,2000 2425,2000 2425,2800 2245,2800 ; 2245,2100 2425,2100 ; 2245,2205 2425,2205 ; 2245,2305 2425,2305 ; 2245,2400 2425,2400 ; 2245,2500 2420,2500 2425,2505 ; 2245,2600 2425,2600 ; 2245,2705 2420,2705 2425,2700 ; 2525,1275 2525,1430 3025,1430 3025,1275 ; 2625,1275 2625,1430 ; 2730,1275 2730,1430 ; 2825,1275 2825,1425 2830,1430 ; 2935,1275 2935,1430 ; 2945,2000 3045,2000 3045,2200 2945,2200 ; 985,1460 1310,1460 1310,1760 990,1760 985,1755 985,1460
  text "GND" at 165,2885 h30 r90
  text "5V" at 265,2880 h30 r90
  text "IO4" at 2285,2635 h30
  text "IO16" at 2285,2535 h30
  text "GND" at 1785,2465 h30
  text "IO17" at 2285,2435 h30
  text "IO5" at 2285,2340 h30
  text "IO18" at 2285,2245 h30
  text "LE" at 1755,2230 h30
  text "IO19" at 2285,2145 h30
  text "CLK" at 1755,2130 h30
  text "3.3V" at 3010,2050 h30 r90
  text "POL" at 1755,2035 h30
  text "IO21" at 2285,2035 h30
  text "DIN4" at 1755,1935 h30
  text "0" at 110,1875 h30
  text "4" at 515,1875 h30
  text "5" at 610,1875 h30
  text "9" at 1020,1875 h30
  text "DIN3" at 1755,1830 h30
  text "GND" at 655,1755 h30
  text "DIN2" at 1755,1730 h30
  text "GND" at 1175,1705 h30
  text "3.3V" at 1175,1635 h30
  text "DIN1" at 1755,1635 h30
  text "3.3V" at 320,1610 h30
  text "5V" at 1180,1555 h30
  text "VH" at 1185,1480 h30
  text "VH" at 370,1470 h30
  text "5V" at 670,1460 h30
  text "VH" at 1780,1315 h30 r90
  text "RST" at 2590,1300 h30 r90
  text "GND" at 2685,1300 h30 r90
  text "SDA" at 2790,1300 h30 r90
  text "SCL" at 2890,1300 h30 r90
  text "3.3V" at 3000,1300 h30 r90
  text "5V" at 1515,1035 h30
  text "DI" at 1515,935 h30
  text "GND" at 1515,830 h30
Mechanical 1:
  the board outline again, w10

## Text inside footprints (layer, text, board x,y; h text height)
P9: Mechanical 13 "PCB END" at 1521.77,3567.68 h19.68 r180
U2: Mechanical 13 "ANTENNA" at 2594.13,3382.24 h70